# Altium PCB TMP-010.PcbDoc
Units mil, origin at the board's own origin, x right, y up, seen from the top; angles counter-clockwise.
Board outline 1750 x 1750 mil, 2 copper layers (Top Layer, Bottom Layer), stack 62.8 mil thick; 29 components, 53 nets, 365 pads, 141 vias.
Unrouted connection lines stored in the file: 1.
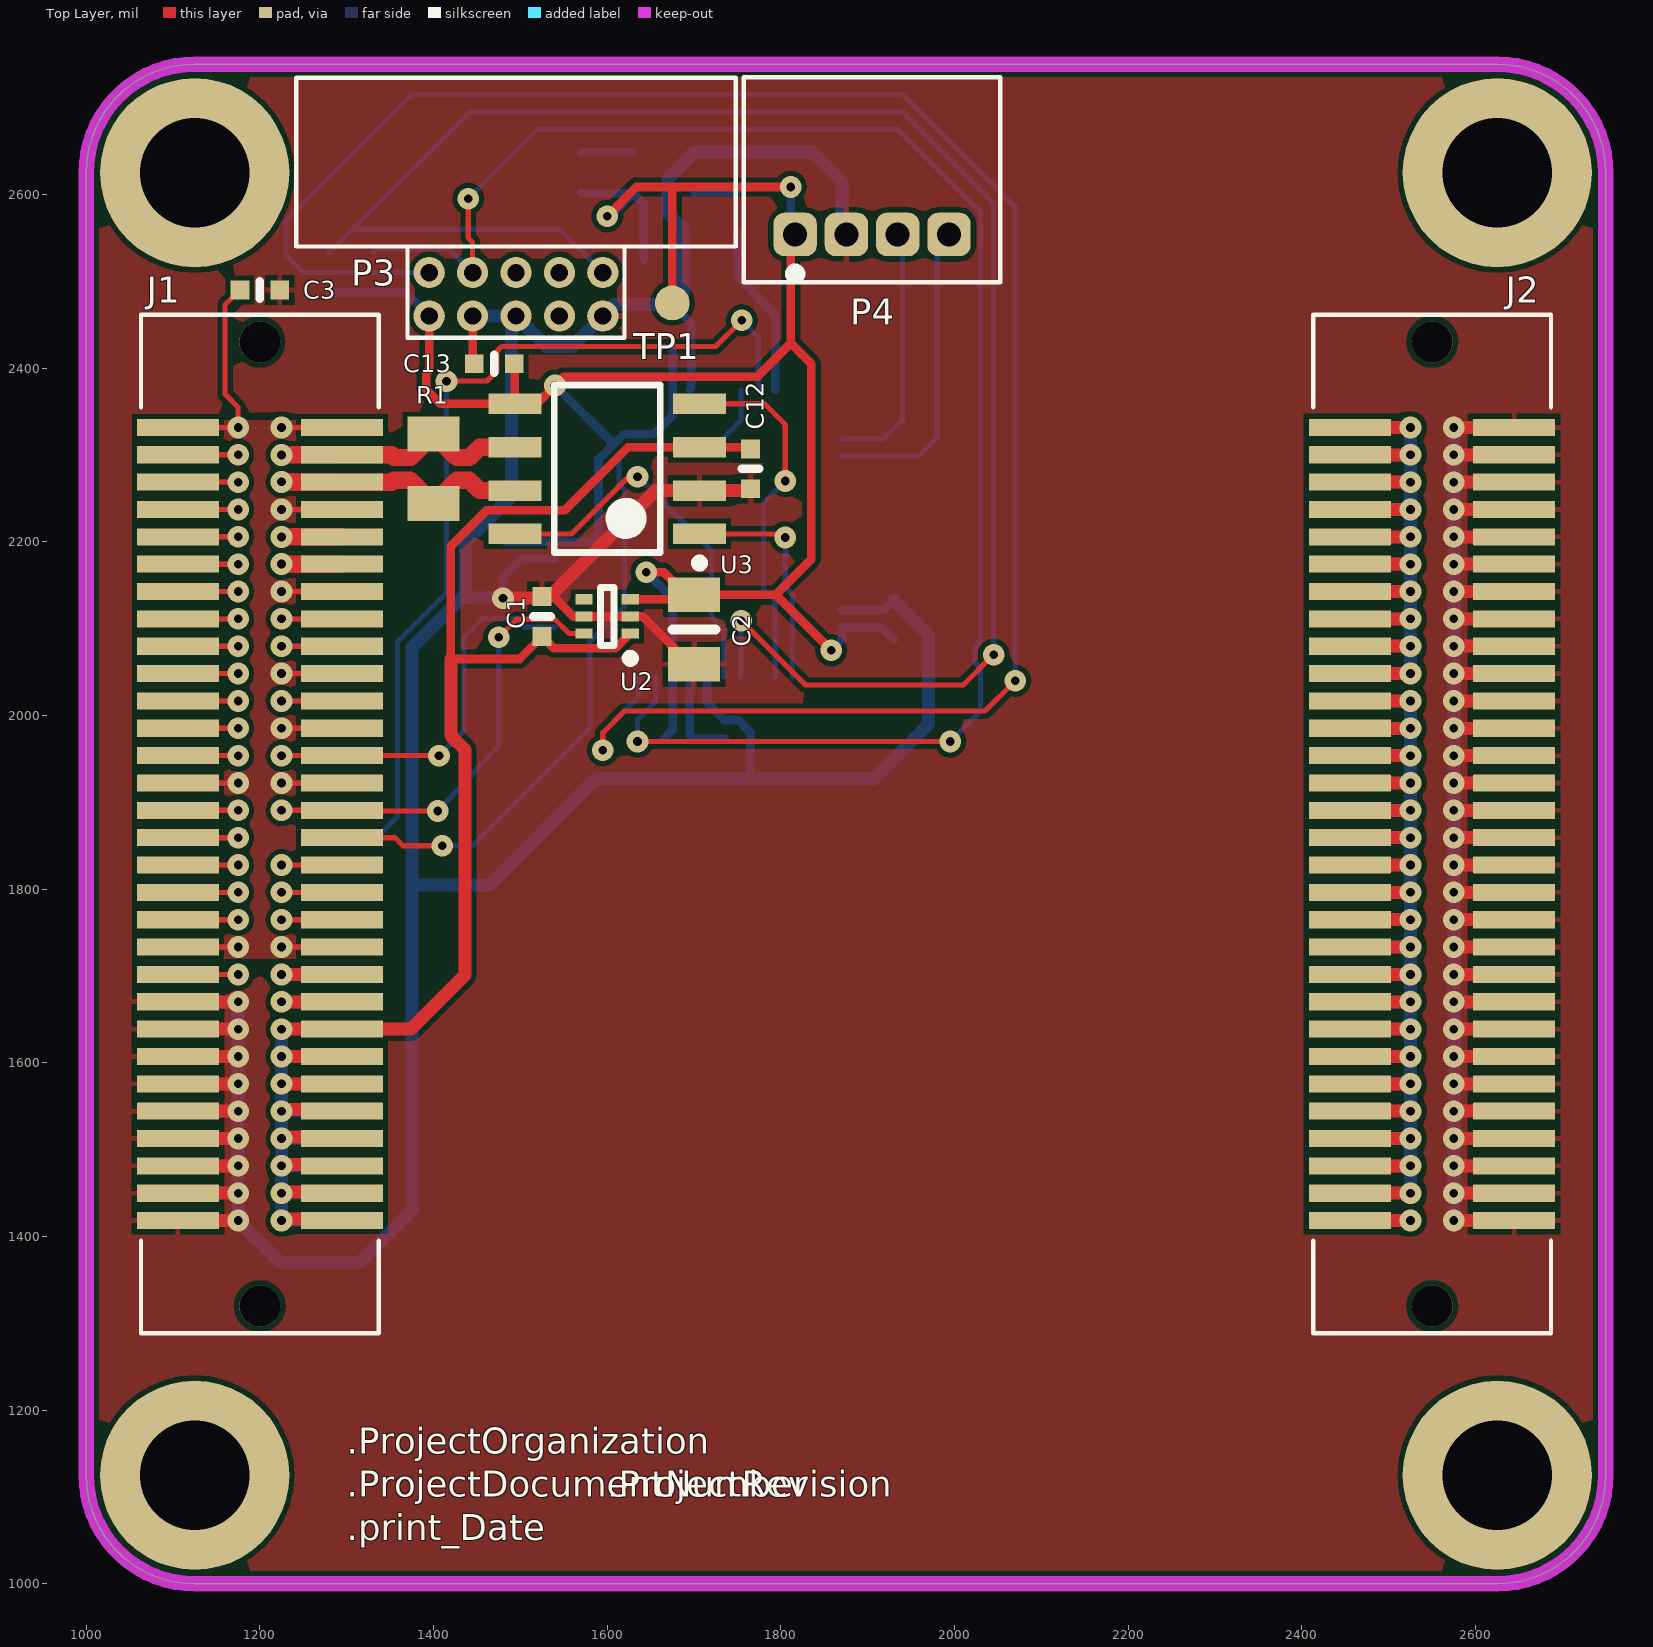
[diagram p0: Top Layer view]
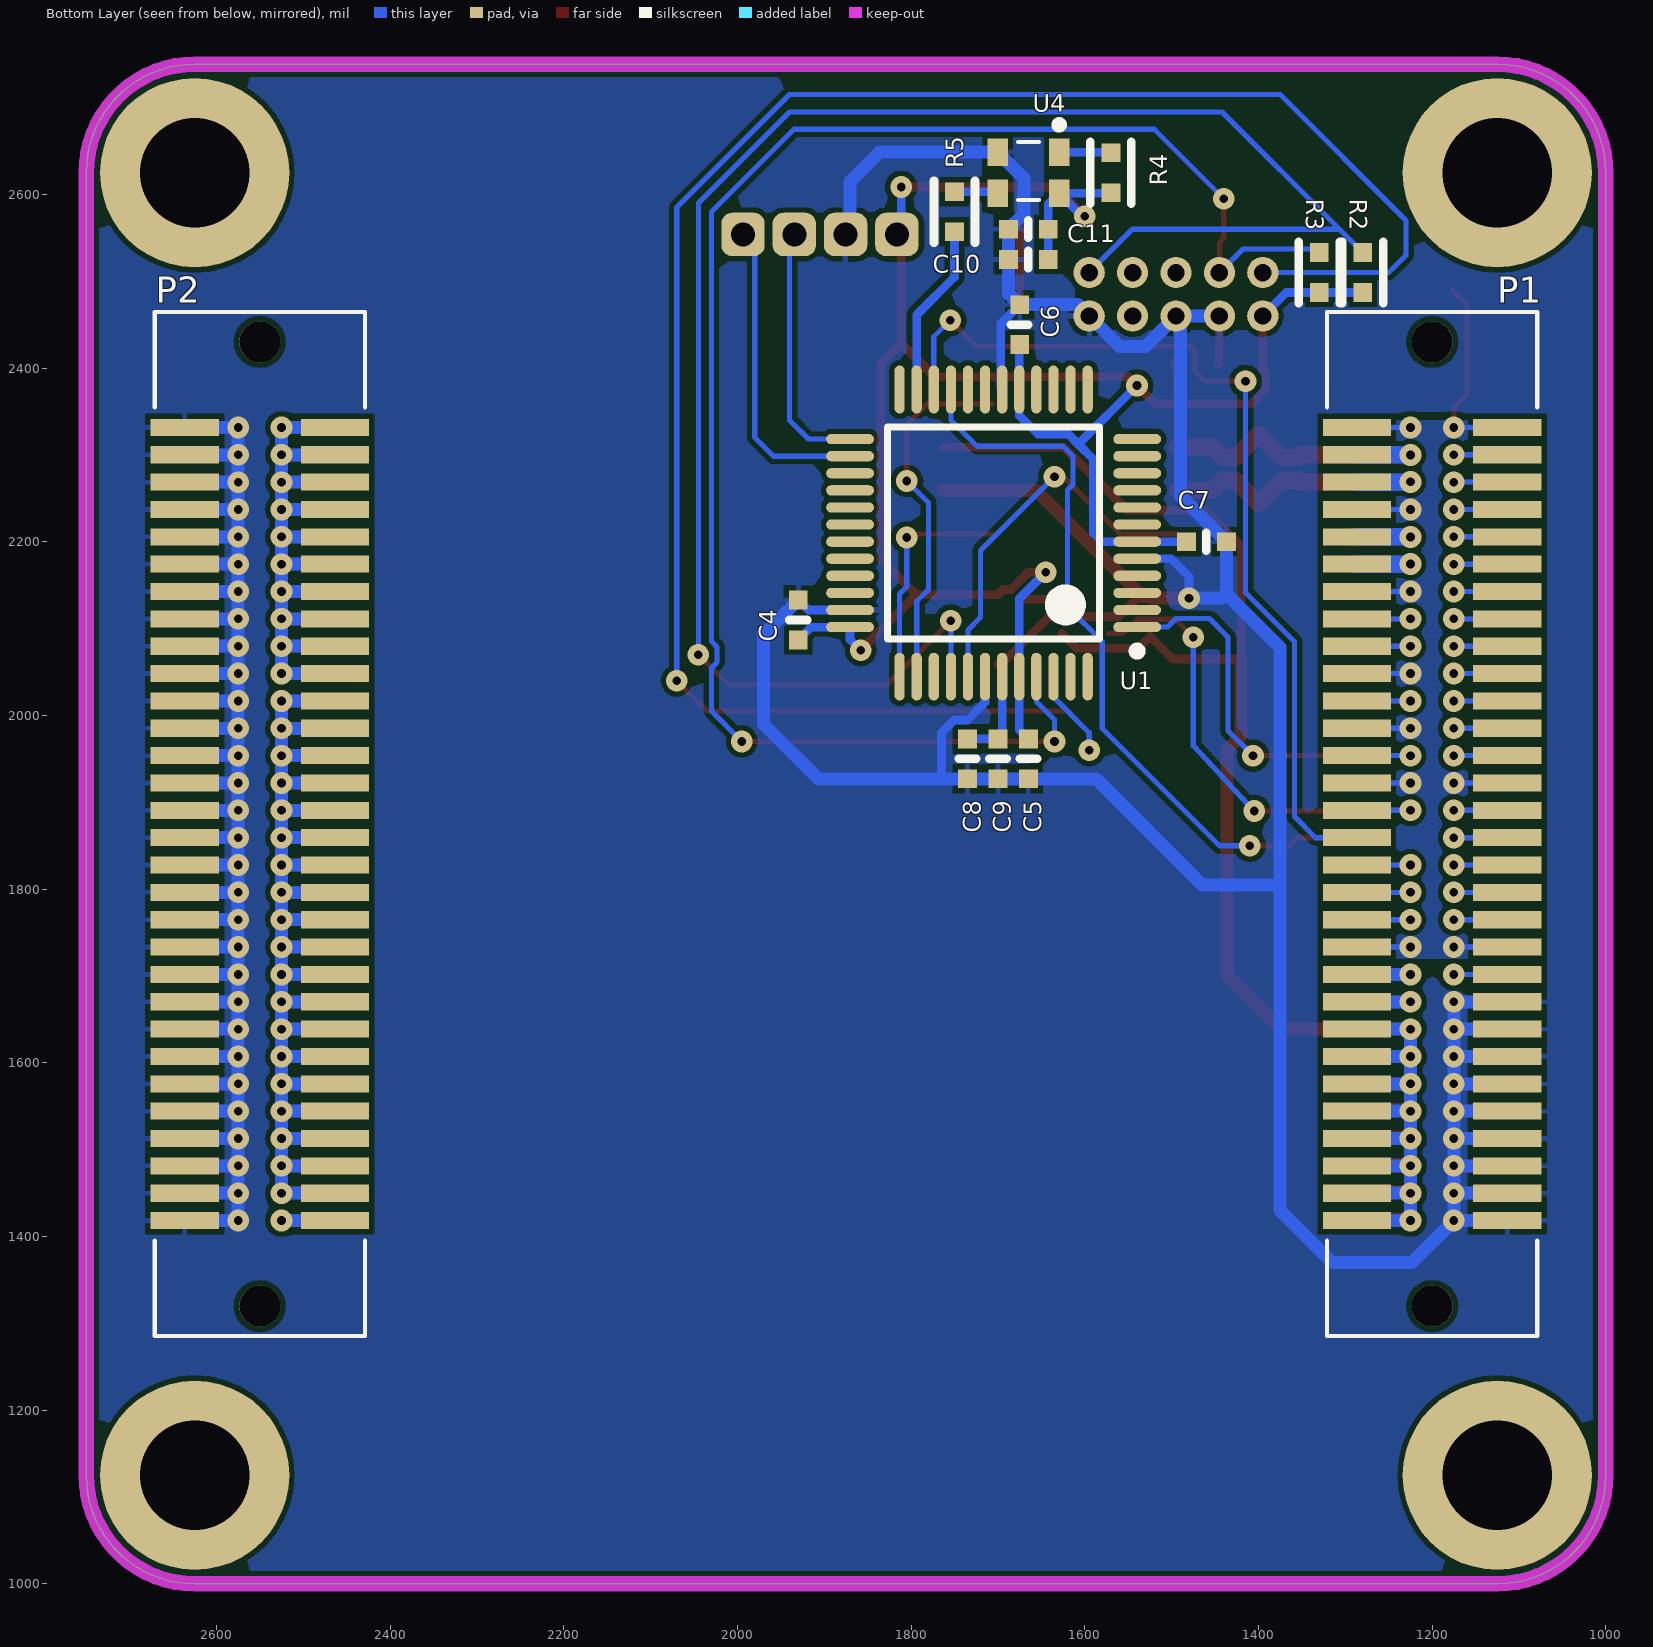
[diagram p1: Bottom Layer view, seen from below]
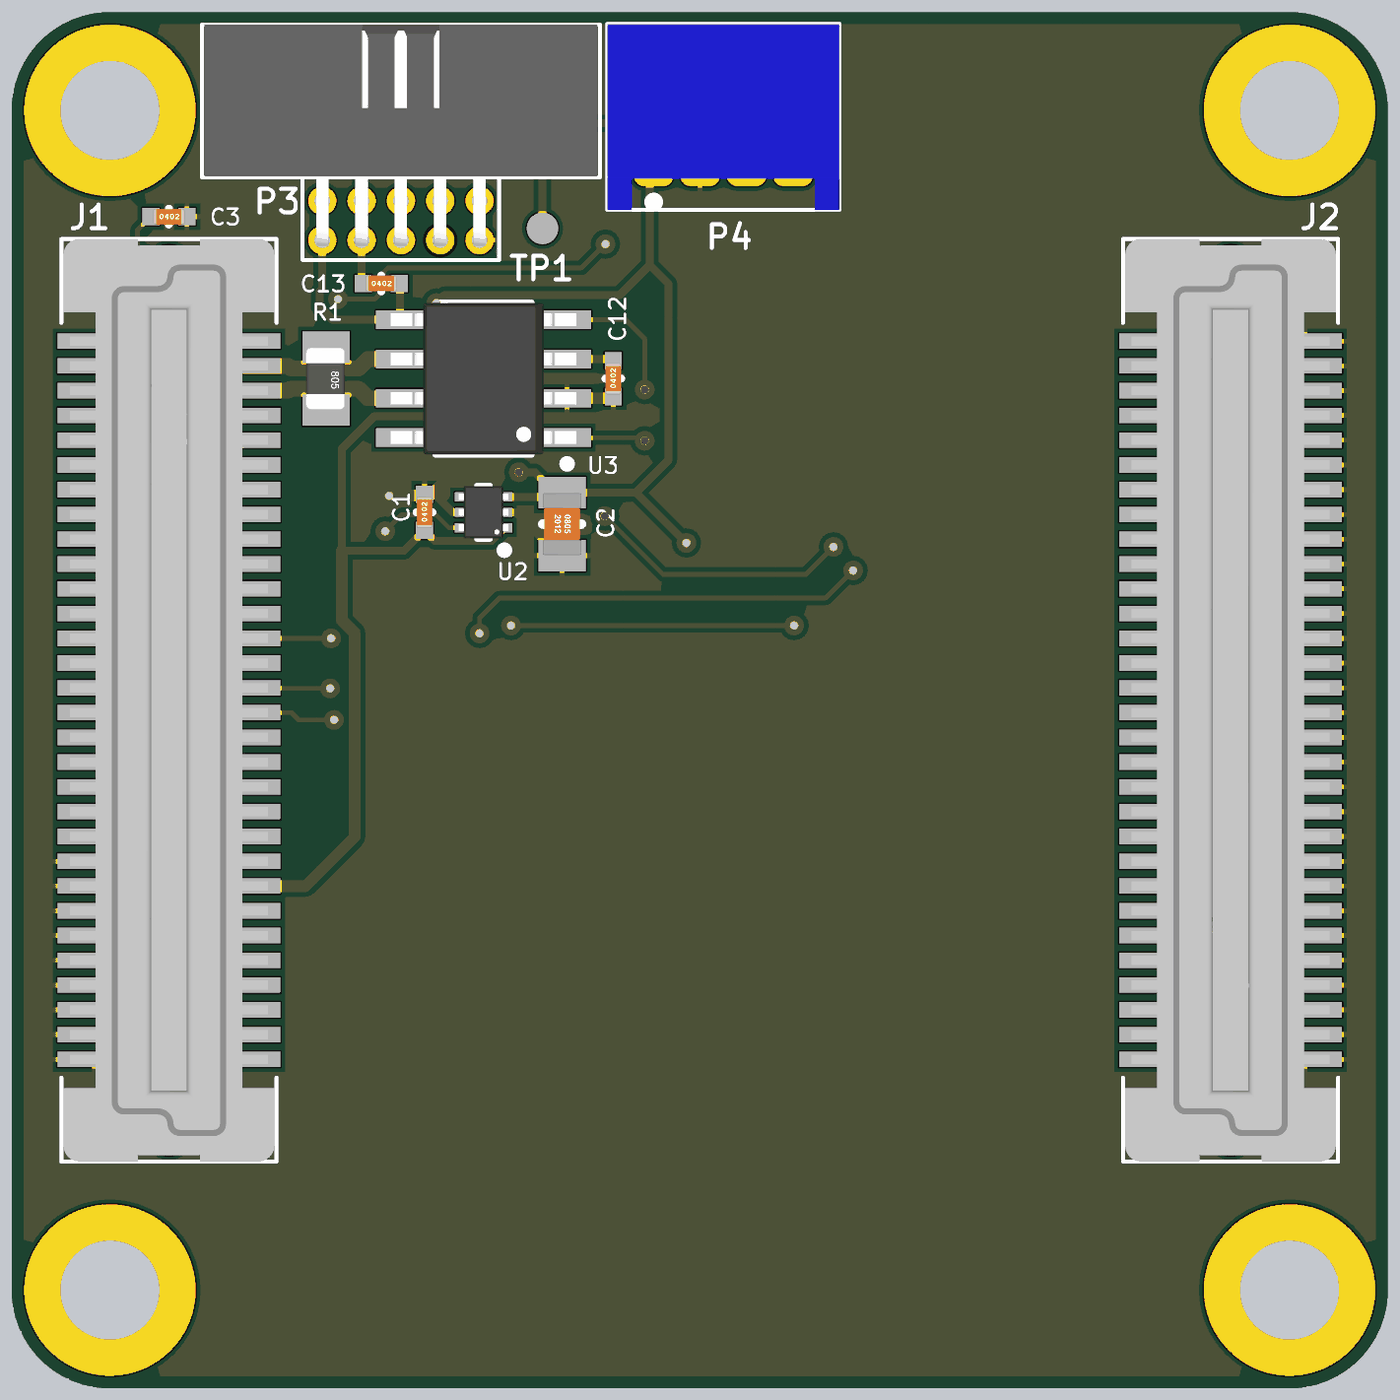
[diagram p2: 3D render of the assembled board from above, using the file's embedded part models]
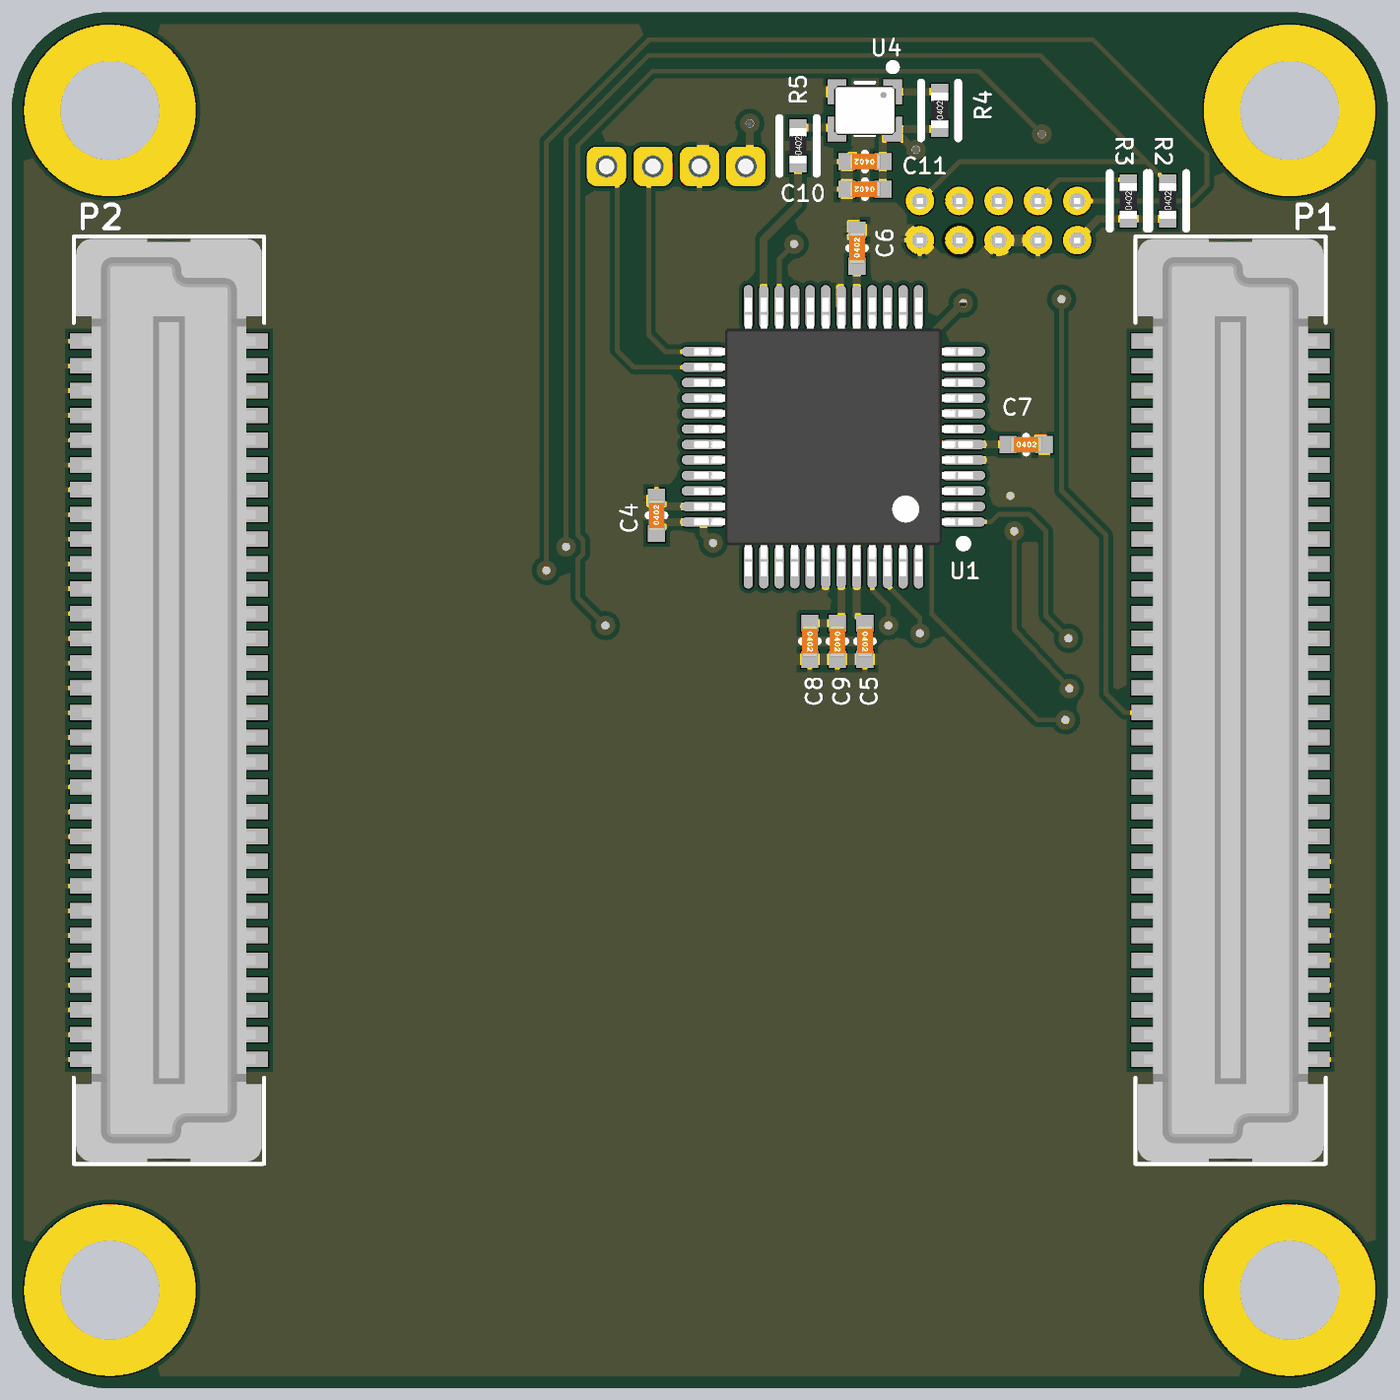
[diagram p3: 3D render of the assembled board from below, using the file's embedded part models]

## Layer stack, top to bottom
Top Solder: solder mask 1, Solder Resist, Dk 3.5
Top Layer: signal copper 1.4
Dielectric 1: core 60, FR-4, Dk 4.6
Bottom Layer: signal copper 1.4
Bottom Solder: solder mask 1, Solder Resist, Dk 3.5

## Board outline
1000,1125 1000,2625 cw(c1125,2625) 1125,2750 2625,2750 cw(c2625,2625) 2750,2625 2750,1125 cw(c2625,1125) 2625,1000 1125,1000 cw(c1125,1125)

## Design rules (kind name [scope] priority, off if disabled: settings)
AssemblyTestPointUsage AssemblyTestPointUsage_1 [All] p2:
AssemblyTestpoint AssemblyTestpoint_1 [All] p2: testpointundercomponent=TRUE minsize=40 maxsize=100 preferedsize=60 minholesize=0 maxholesize=40 preferedholesize=32 testpointgrid=1 usegrid=TRUE gridtolerance=0.01 allowsidetop=TRUE allowsidebottom=TRUE
Clearance [All] p1: gap=6 ignorepadtopadclearanceinfootprint=FALSE except(0: Arc-Hole Track-Hole SMDPad-Hole THPad-Hole Via-Hole Fill-Hole Poly-Hole Region-Hole Text-Hole)
ComponentClearance ComponentClearance_Top [OnTop vs OnTop] p1: gap=10 collisioncheckmode=3 verticalgap=100000 showdistances=FALSE
ComponentClearance ComponentClearance_Bottom [OnBottom vs OnBottom] p2: gap=10 collisioncheckmode=3 verticalgap=100000 showdistances=FALSE
DiffPairsRouting [All] p1: maxlimit=6 minlimit=6 mostfreqgap=6 toplayer_minwidth=20 toplayer_maxwidth=20 toplayer_prefwidth=20 bottomlayer_minwidth=20 bottomlayer_maxwidth=20 bottomlayer_prefwidth=20 maxuncoupledlength=500
FabricationTestPointUsage FabricationTestPointUsage_1 [All] p2: valid=0 allowmultiple=FALSE
FabricationTestpoint FabricationTestpoint_1 [All] p2: side=3 testpointundercomponent=TRUE minsize=40 maxsize=100 preferedsize=60 minholesize=0 maxholesize=40 preferedholesize=32 testpointgrid=1 allowsidetop=TRUE allowsidebottom=TRUE usegrid=TRUE gridtolerance=0.01
Height Height_Bottom [TouchesRoom('BoardHeight_Bottom') and OnBottom and not ((Name='J1') or (Name='J2') or (Name='P1') or (Name='P2') )] p1: minheight=0 maxheight=152 prefheight=0
Height Height_Top [TouchesRoom('BoardHeight_Top') and OnTop and not ((Name='J1') or (Name='J2') or (Name='P1') or (Name='P2') )] p2: minheight=0 maxheight=310 prefheight=0
HoleSize [All] p1: absolutevalues=TRUE maxlimit=130 minlimit=10 maxpercent=80.000 minpercent=20.000
MinimumSolderMaskSliver [All] p1: minsoldermaskwidth=3
PolygonConnect [All] p1: thpad.connectstyle=Relief thpad.reliefconductorwidth=6 thpad.reliefentries=4 thpad.polygonreliefangle="90 Angle" thpad.airgapwidth=6 smdpad.connectstyle=Relief smdpad.reliefconductorwidth=6 smdpad.reliefentries=4 smdpad.polygonreliefangle="90 Angle" smdpad.airgapwidth=6 via.connectstyle=Direct via.reliefconductorwidth=10 via.reliefentries=4 via.polygonreliefangle="90 Angle" via.airgapwidth=10
RoomDefinition BoardHeight_Bottom [False] p1: confinementstyle=ConfineIn formatcopy=TRUE lockcomponents=FALSE outline 1000,2750 2750,2750 2750,1000 1000,1000
RoomDefinition BoardHeight_Top [False] p2: confinementstyle=ConfineIn formatcopy=TRUE lockcomponents=FALSE outline 2750,2750 1000,2750 1000,1000 2750,1000
RoutingVias [All] p1: holewidth=10 width=25 viastyle="Through Hole" minholewidth=10 minwidth=25 maxholewidth=28 maxwidth=50
SilkToBoardRegionClearance SilkToBoardRegionClearance_1 [All] p2:
SilkToSilkClearance [All] p1: silktosilkclearance=2
SilkToSolderMaskClearance [IsPad] p1: minsilkscreentomaskgap=4 clearancetoexposedcopper=TRUE
SolderMaskExpansion [All] p1: expansion=2 istentingtop=FALSE
UnRoutedNet [All] p1: checkbadconnections=TRUE
Width "Schematic Width Constraint_1" [InNet('XTAL')] p1: maxlimit=10 minlimit=10 preferedwidth=10
Width "Schematic Width Constraint" [InNet('NetR5_1')] p2: maxlimit=10 minlimit=10 preferedwidth=10
Width Width_1 [All] p3: maxlimit=100 minlimit=6 preferedwidth=10
22 further rules are at their usual default settings.

## Classes and differential pairs
component class Sheet1: C1 C2 C3 C12 C13 J1 J2 P1 P2 P4 R1 U2 U3
component class Sheet2: C4 C5 C6 C7 C8 C9 C10 C11 R2 R3 U4
differential pair CAN1: +CAN1_P -CAN1_N
differential pair CAN0: +CAN0_P -CAN0_N

## Components (designator, comment, footprint, x,y, rotation, side; value= is the part's Value field where it differs from the comment)
C1 "1µF" SMD-0402C 1525,2114 r0 top
C2 "4.7µF" SMD-0805C 1700,2099 r180 top
C3 "0.10µF" SMD-0402C 1200,2490 r270 top
C4 "0.10µF" SMD-0402C 1930,2110 r180 bottom
C5 "0.10µF" SMD-0402C 1665,1950 r0 bottom
C6 "0.10µF" SMD-0402C 1675,2450 r180 bottom
C7 "0.10µF" SMD-0402C 1460,2200 r270 bottom
C8 "1µF" SMD-0402C 1735,1950 r0 bottom
C9 "0.10µF" SMD-0402C 1700,1950 r0 bottom
C10 "0.10µF" SMD-0402C 1665,2525 r90 bottom
C11 "10000pF" SMD-0402C 1665,2560 r90 bottom
C12 "0.10µF" SMD-0402C 1765,2284 r0 top
C13 "0.10µF" SMD-0402C 1470,2405 r270 top
J1 "10144517-062802LF" 10144517-062802LF 1200,1875 r90 top locked
J2 "10144517-062802LF" 10144517-062802LF 2550,1875 r90 top locked
P1 "10144518-064802LF" 10144518-064802LF 1200,1875 r270 bottom locked
P2 "10144518-064802LF" 10144518-064802LF 2550,1875 r270 bottom locked
P3 "2x5_0.05_SWD" 2X5_0.05_R 1495,2460 r180 top
P4 "S4B-ZR(LF)(SN)" S4B-ZR(LF)(SN) 1905,2735 r180 top
R1 "120" SMD-0805-RES 1400,2284 r180 top
R2 "10k" SMD-0402-RES 1280,2510 r180 bottom
R3 "1k" SMD-0402-RES 1330,2510 r180 bottom
R4 "1k" SMD-0402-RES 1570,2625 r180 bottom
R5 "22" SMD-0402-RES 1750,2580 r180 bottom
TP1 "TP" TP_SMD_40 1675,2475 r90 top
U1 "ATSAMC21G17A-AUT" TSQFP50P900X900X120-48N 1705,2210 r0 bottom
U2 "NCV8170AXV330T2G" SOTFL50P160X60-6N 1600,2114 r180 top
U3 "ATA6561-GAQW" SOIC127P600X175-8N 1600,2284 r180 top
U4 "MC2016K30.0000C16ESH" MC2016 1665,2625 r0 bottom

## Footprints (in the part's own frame and the unit in brackets; to place one, negate y for a bottom-side part, rotate by r counter-clockwise, add the part's x,y. Pads: shape width x height; smd on the part's side, far side on the other; paste and mask are expansions set on the pad)
2X5_0.05_R [mil]
  round 36 hole 20: 1(100,0) 2(100,-50) 3(50,0) 4(50,-50) 5(0,0) 6(0,-50) 8(-50,-50) 9(-100,0) 10(-100,-50)
  round 36 hole 20 mask+4: 7(-50,0)
  silkscreen extent -253,-274 253,25, body extent -250,-274 250,8, height 198
10144517-062802LF [mm]
  rect 0.5x2.4 smd: 1(11.6,2.4) 2(11.6,-2.4) 3(10.8,2.4) 4(10.8,-2.4) 5(10,2.4) 6(10,-2.4) 7(9.2,2.4) 8(9.2,-2.4) 9(8.4,2.4) 10(8.4,-2.4) 11(7.6,2.4) 12(7.6,-2.4) 13(6.8,2.4) 14(6.8,-2.4) 15(6,2.4) 16(6,-2.4) 17(5.2,2.4) 18(5.2,-2.4) 19(4.4,2.4) 20(4.4,-2.4) 21(3.6,2.4) 22(3.6,-2.4) 23(2.8,2.4) 24(2.8,-2.4) 25(2,2.4) 26(2,-2.4) 27(1.2,2.4) 28(1.2,-2.4) 29(0.4,2.4) 30(0.4,-2.4) 31(-0.4,2.4) 32(-0.4,-2.4) 33(-1.2,2.4) 34(-1.2,-2.4) 35(-2,2.4) 36(-2,-2.4) 37(-2.8,2.4) 38(-2.8,-2.4) 39(-3.6,2.4) 40(-3.6,-2.4) 41(-4.4,2.4) 42(-4.4,-2.4) 43(-5.2,2.4) 44(-5.2,-2.4) 45(-6,2.4) 46(-6,-2.4) 47(-6.8,2.4) 48(-6.8,-2.4) 49(-7.6,2.4) 50(-7.6,-2.4) 51(-8.4,2.4) 52(-8.4,-2.4) 53(-9.2,2.4) 54(-9.2,-2.4) 55(-10,2.4) 56(-10,-2.4) 57(-10.8,2.4) 58(-10.8,-2.4) 59(-11.6,2.4) 60(-11.6,-2.4)
  round 1.2 hole 1.2 unplated: M1(14.1,0)
  silkscreen extent -14.9,-3.47 14.9,3.47, body extent -14.9,-3.4 14.9,3.4, height 7.65
10144518-064802LF [mm]
  rect 0.5x2 smd: 1(-11.6,2.2) 2(-11.6,-2.2) 3(-10.8,2.2) 4(-10.8,-2.2) 5(-10,2.2) 6(-10,-2.2) 7(-9.2,2.2) 8(-9.2,-2.2) 9(-8.4,2.2) 10(-8.4,-2.2) 11(-7.6,2.2) 12(-7.6,-2.2) 13(-6.8,2.2) 14(-6.8,-2.2) 15(-6,2.2) 16(-6,-2.2) 17(-5.2,2.2) 18(-5.2,-2.2) 19(-4.4,2.2) 20(-4.4,-2.2) 21(-3.6,2.2) 22(-3.6,-2.2) 23(-2.8,2.2) 24(-2.8,-2.2) 25(-2,2.2) 26(-2,-2.2) 27(-1.2,2.2) 28(-1.2,-2.2) 29(-0.4,2.2) 30(-0.4,-2.2) 31(0.4,2.2) 32(0.4,-2.2) 33(1.2,2.2) 34(1.2,-2.2) 35(2,2.2) 36(2,-2.2) 37(2.8,2.2) 38(2.8,-2.2) 39(3.6,2.2) 40(3.6,-2.2) 41(4.4,2.2) 42(4.4,-2.2) 43(5.2,2.2) 44(5.2,-2.2) 45(6,2.2) 46(6,-2.2) 47(6.8,2.2) 48(6.8,-2.2) 49(7.6,2.2) 50(7.6,-2.2) 51(8.4,2.2) 52(8.4,-2.2) 53(9.2,2.2) 54(9.2,-2.2) 55(10,2.2) 56(10,-2.2) 57(10.8,2.2) 58(10.8,-2.2) 59(11.6,2.2) 60(11.6,-2.2)
  round 1.2 hole 1.2 unplated: M2(14.1,0)
  silkscreen extent -14.97,-3.08 14.97,3.08, body extent -14.9,-3 14.9,3, height 7.65
MC2016 [mm]
  rect 0.6x0.8 smd: 1(-0.9,-0.6) 2(0.9,-0.6) 3(0.9,0.6) 4(-0.9,0.6)
  silkscreen extent -1,-1.5 0.3,0.8, body extent -1,-0.8 1,0.8, height 0.4
S4B-ZR(LF)(SN) [mm]
  rrect50% 1.27x1.27 hole 0.7: 1(2.25,4.6) 2(0.75,4.6) 3(-0.75,4.6) 4(-2.25,4.6)
  silkscreen extent -3.75,0 3.75,6, body extent -3.75,0 3.75,6, height 3.7
SMD-0402-RES [mm]
  rect 0.55x0.55 smd: 1(0,0.584) 2(0,-0.584)
  silkscreen extent -0.6,-0.9 0.6,0.9, body extent -0.27,-0.57 0.28,0.58, height 0.41
SMD-0402C [mm]
  rect 0.55x0.55 smd: 1(0,0.584) 2(0,-0.584)
  silkscreen extent -0.25,0 0.25,0, body extent -0.25,-0.51 0.25,0.51, height 0.51
SMD-0805-RES [mil]
  rect 60x40 smd: 1(0,40) 2(0,-40)
  body extent -24,-39 26,39, height 31
SMD-0805C [mil]
  rect 60x40 smd: 1(0,40) 2(0,-40)
  silkscreen extent -25,0 25,0, body extent -25,-39 25,39, height 35
SOIC127P600X175-8N [mm] "SOIC, 8-Leads, Body 4.90x3.90mm, Pitch 1.27mm, IPC Medium Density"
  rect 1.55x0.6 smd: 1(-2.7,1.905) 2(-2.7,0.635) 3(-2.7,-0.635) 4(-2.7,-1.905) 5(2.7,-1.905) 6(2.7,-0.635) 7(2.7,0.635) 8(2.7,1.905)
  silkscreen extent -2.83,-2.45 1.55,2.88, body extent -3,-2.45 3,2.45, height 1.75
SOTFL50P160X60-6N [mm] "SOTFL, 6-Leads, Body 1.60x1.60mm, Pitch 0.50mm, IPC Medium Density"
  rect 0.5x0.3 smd mask+0.051: 1(-0.675,0.5) 2(-0.675,0) 3(-0.675,-0.5) 4(0.675,-0.5) 5(0.675,0) 6(0.675,0.5)
  silkscreen extent -0.8,-0.85 0.2,1.35, body extent -0.8,-0.85 0.8,0.85, height 0.6
TP_SMD_40 [mil]
  round 40 smd: 1(0,0)
TSQFP50P900X900X120-48N [mm] "TSQFP, 48-Leads, Body 7.00x7.00mm, Pitch 0.50mm, IPC Medium Density"
  oval 1.4x0.3 smd: 1(-4.2,2.75) 2(-4.2,2.25) 3(-4.2,1.75) 4(-4.2,1.25) 5(-4.2,0.75) 6(-4.2,0.25) 7(-4.2,-0.25) 8(-4.2,-0.75) 9(-4.2,-1.25) 10(-4.2,-1.75) 11(-4.2,-2.25) 12(-4.2,-2.75) 25(4.2,-2.75) 26(4.2,-2.25) 27(4.2,-1.75) 28(4.2,-1.25) 29(4.2,-0.75) 30(4.2,-0.25) 31(4.2,0.25) 32(4.2,0.75) 33(4.2,1.25) 34(4.2,1.75) 35(4.2,2.25) 36(4.2,2.75)
  oval 0.3x1.4 smd: 13(-2.75,-4.2) 14(-2.25,-4.2) 15(-1.75,-4.2) 16(-1.25,-4.2) 17(-0.75,-4.2) 18(-0.25,-4.2) 19(0.25,-4.2) 20(0.75,-4.2) 21(1.25,-4.2) 22(1.75,-4.2) 23(2.25,-4.2) 24(2.75,-4.2) 37(2.75,4.2) 38(2.25,4.2) 39(1.75,4.2) 40(1.25,4.2) 41(0.75,4.2) 42(0.25,4.2) 43(-0.25,4.2) 44(-0.75,4.2) 45(-1.25,4.2) 46(-1.75,4.2) 47(-2.25,4.2) 48(-2.75,4.2)
  silkscreen extent -4.32,-3.1 3.1,3.57, body extent -4.5,-4.5 4.5,4.5, height 1.2

## Part data
C1 C8: library part GCM155C71A105KE38D, "CAP CER 1UF 10V X7S 0402", Digi-Key Part Number=490-13409-1-ND, Manufacturer="Murata Electronics North America", Operating Temperature="-55°C ~ 125°C", Package / Case="0402 (1005 Metric)", Ratings=AEC-Q200, Temperature Coefficient=X7S, Tolerance=±10%, Voltage=10V, @ qty=0, Applications=Automotive, Datasheets=http://www.murata.com/~/media/webrenewal/support/library/catalog/products/capacitor/mlcc/c03e.ashx, Factory Stock=0, Features=-, Height - Seated (Max)=-, Image=//media.digikey.com/Renders/Murata%20Renders/ZRB-SERIES-0402.jpg, Lead Spacing=-, Lead Style=-, Minimum Quantity=1, Mounting Type="Surface Mount, MLCC", Packaging="Cut Tape (CT)", Part Number=GCM155C71A105KE38D, Part Status=Active, Quantity Available=7240, Series=GCM, Size / Dimension="0.039\" L x 0.020\" W (1.00mm x 0.50mm)", Thickness (Max)="0.022\" (0.55mm)", Unit Price (USD)=0.12
C2: library part GCJ21BR71C475KA01L, "CAP CER 4.7UF 16V X7R 0805", Digi-Key Part Number=490-10557-1-ND, Manufacturer="Murata Electronics North America", Operating Temperature="-55°C ~ 125°C", Package / Case="0805 (2012 Metric)", Ratings=AEC-Q200, Temperature Coefficient=X7R, Tolerance=±10%, Voltage=16V, @ qty=0, Applications="Automotive, Boardflex Sensitive", Datasheets=http://www.murata.com/~/media/webrenewal/support/library/catalog/products/capacitor/mlcc/c03e.ashx, Factory Stock=0, Features="Soft Termination", Height - Seated (Max)=-, Image=//media.digikey.com/Renders/Murata%20Renders/0805%20(2012%20Metric)%20.85mm.jpg, Lead Spacing=-, Lead Style=-, Minimum Quantity=1, Mounting Type="Surface Mount, MLCC", Packaging="Cut Tape (CT)", Part Number=GCJ21BR71C475KA01L, Part Status=Active, Quantity Available=53217, Series=GCJ, Size / Dimension="0.079\" L x 0.049\" W (2.00mm x 1.25mm)", Thickness (Max)="0.057\" (1.45mm)", Unit Price (USD)=0.44
C3 C4 C5 C6 C7 C9 C10 C12 C13: library part GCM155R71C104KA55D, "CAP CER 0.1UF 16V X7R 0402", Digi-Key Part Number=490-4759-1-ND, Manufacturer="Murata Electronics North America", Operating Temperature="-55°C ~ 125°C", Package / Case="0402 (1005 Metric)", Ratings=AEC-Q200, Temperature Coefficient=X7R, Tolerance=±10%, Voltage=16V, @ qty=0, Applications=Automotive, Datasheets=http://www.murata.com/~/media/webrenewal/support/library/catalog/products/capacitor/mlcc/c03e.ashx, Factory Stock=0, Features=-, Height - Seated (Max)=-, Image=//media.digikey.com/Renders/Murata%20Renders/ZRB-SERIES-0402.jpg, Lead Spacing=-, Lead Style=-, Minimum Quantity=1, Mounting Type="Surface Mount, MLCC", Packaging="Cut Tape (CT)", Part Number=GCM155R71C104KA55D, Part Status=Active, Quantity Available=734194, Series=GCM, Size / Dimension="0.039\" L x 0.020\" W (1.00mm x 0.50mm)", Thickness (Max)="0.022\" (0.55mm)", Unit Price (USD)=0.1
C11: library part GCM155R71E103KA37D, "CAP CER 10000PF 25V X7R 0402", Digi-Key Part Number=490-6043-1-ND, Manufacturer="Murata Electronics North America", Operating Temperature="-55°C ~ 125°C", Package / Case="0402 (1005 Metric)", Ratings=AEC-Q200, Temperature Coefficient=X7R, Tolerance=±10%, Voltage=25V, @ qty=0, Applications=Automotive, Datasheets=http://www.murata.com/~/media/webrenewal/support/library/catalog/products/capacitor/mlcc/c03e.ashx, Factory Stock=0, Features=-, Height - Seated (Max)=-, Image=//media.digikey.com/Renders/Murata%20Renders/ZRB-SERIES-0402.jpg, Lead Spacing=-, Lead Style=-, Minimum Quantity=1, Mounting Type="Surface Mount, MLCC", Packaging="Cut Tape (CT)", Part Number=GCM155R71E103KA37D, Part Status=Active, Quantity Available=128782, Series=GCM, Size / Dimension="0.039\" L x 0.020\" W (1.00mm x 0.50mm)", Thickness (Max)="0.022\" (0.55mm)", Unit Price (USD)=0.1
R1: library part ERJ-P6WJ121V, "RES SMD 120 OHM 5% 1/2W 0805", Digi-Key Part Number=P16943CT-ND, Manufacturer="Panasonic Electronic Components", Operating Temperature="-55°C ~ 155°C", Package / Case="0805 (2012 Metric)", Power (Watts)="0.5W, 1/2W", Supplier Device Package=0805, Temperature Coefficient=±200ppm/°C, Tolerance=±5%, @ qty=1500, Composition="Thick Film", Datasheets=https://industrial.panasonic.com/cdbs/www-data/pdf/RDA0000/AOA0000C243.pdf, Factory Stock=0, Failure Rate=-, Features="Automotive AEC-Q200, Pulse Withstanding", Height - Seated (Max)="0.030\" (0.75mm)", Image=//media.digikey.com/Renders/Panasonic%20Renders/ERJ-0805%20Pkg.jpg, Minimum Quantity=1, Number of Terminations=2, Packaging="Cut Tape (CT)", Part Number=ERJ-P6WJ121V, Part Status=Active, Quantity Available=4133, Series=ERJ, Size / Dimension="0.079\" L x 0.049\" W (2.00mm x 1.25mm)", Unit Price (USD)=0.08237
R2: library part ERJ-2GEJ103X, "RES SMD 10K OHM 5% 1/10W 0402", Digi-Key Part Number=P10KJCT-ND, Manufacturer="Panasonic Electronic Components", Operating Temperature="-55°C ~ 155°C", Package / Case="0402 (1005 Metric)", Power (Watts)="0.1W, 1/10W", Supplier Device Package=0402, Temperature Coefficient=±200ppm/°C, Tolerance=±5%, @ qty=1500, Composition="Thick Film", Datasheets=http://industrial.panasonic.com/www-cgi/jvcr13pz.cgi?E+PZ+3+AOA0001+ERJ2GEJ103X+7+WW, Factory Stock=0, Failure Rate=-, Features="Automotive AEC-Q200", Height - Seated (Max)="0.016\" (0.40mm)", Image=//media.digikey.com/Photos/Panasonic%20Photos/ERJ-PA2-Series.jpg, Minimum Quantity=1, Number of Terminations=2, Packaging="Cut Tape (CT)", Part Number=ERJ-2GEJ103X, Part Status=Active, Quantity Available=2560215, Series=ERJ, Size / Dimension="0.039\" L x 0.020\" W (1.00mm x 0.50mm)", Unit Price (USD)=0.00350
R3 R4: library part ERJ-2GEJ102X, "RES SMD 1K OHM 5% 1/10W 0402", Digi-Key Part Number=P1.0KJCT-ND, Manufacturer="Panasonic Electronic Components", Operating Temperature="-55°C ~ 155°C", Package / Case="0402 (1005 Metric)", Power (Watts)="0.1W, 1/10W", Supplier Device Package=0402, Temperature Coefficient=±200ppm/°C, Tolerance=±5%, @ qty=1500, Composition="Thick Film", Datasheets=http://industrial.panasonic.com/www-cgi/jvcr13pz.cgi?E+PZ+3+AOA0001+ERJ2GEJ102X+7+WW, Factory Stock=0, Failure Rate=-, Features="Automotive AEC-Q200", Height - Seated (Max)="0.016\" (0.40mm)", Image=//media.digikey.com/Photos/Panasonic%20Photos/ERJ-PA2-Series.jpg, Minimum Quantity=1, Number of Terminations=2, Packaging="Cut Tape (CT)", Part Number=ERJ-2GEJ102X, Part Status=Active, Quantity Available=1939857, Series=ERJ, Size / Dimension="0.039\" L x 0.020\" W (1.00mm x 0.50mm)", Unit Price (USD)=0.00350
R5: library part ERJ-2RKF22R0X, "RES SMD 22 OHM 1% 1/10W 0402", Digi-Key Part Number=P22.0LCT-ND, Manufacturer="Panasonic Electronic Components", Operating Temperature="-55°C ~ 155°C", Package / Case="0402 (1005 Metric)", Power (Watts)="0.1W, 1/10W", Supplier Device Package=0402, Temperature Coefficient=±100ppm/°C, Tolerance=±1%, @ qty=1500, Composition="Thick Film", Datasheets=http://industrial.panasonic.com/www-cgi/jvcr13pz.cgi?E+PZ+3+AOA0002+ERJ2RKF22R0X+7+WW, Factory Stock=0, Failure Rate=-, Features="Automotive AEC-Q200", Height - Seated (Max)="0.016\" (0.40mm)", Image=//media.digikey.com/Photos/Panasonic%20Photos/ERJ-PA2-Series.jpg, Minimum Quantity=1, Number of Terminations=2, Packaging="Cut Tape (CT)", Part Number=ERJ-2RKF22R0X, Part Status=Active, Quantity Available=620432, Series=ERJ, Size / Dimension="0.039\" L x 0.020\" W (1.00mm x 0.50mm)", Unit Price (USD)=0.00496
J1 J2: Unit Price (USD)=1.28
P1 P2: Unit Price (USD)=1.52
P3: Unit Price (USD)=0.75
P4: Unit Price (USD)=0.24
U1: Unit Price (USD)=2.35
U2: Unit Price (USD)=0.44
U3: Unit Price (USD)=0.53
U4: Unit Price (USD)=2.37

## Free pads (board coordinates)
  round 218 hole 125.98: 0(1125,1125) 0(1125,2625) 0(2625,1125) 0(2625,2625)

## Via types
v1: diameter 25, hole 10, Top Layer to Bottom Layer, tented both sides, 141 vias

## Nets (pads, with @x,y where several pads share a name; then routed paths per layer and width w, separated by ;. In a path a pad name is that pad's centre, name@x,y a point inside that pad or via, vN(x,y) a via of type N, cw(c..) or ccw(c..) an arc to the next point about the centre after c; other vN are vias at no path point)
+0.9V_REF: J1.42 P1.42 | length 131.1
  Top Layer w15: v1(1225,1701.77) J1.42
  Bottom Layer w15: v1(1225,1701.77) P1.42
+3.3V: C2.2 C4.2 C5.2 C6.2 C7.2 C10.2 C11.2 C13.1 P3.1 P4.1 R2.2 R3.2 R4.2 TP1.1 U1.6 U1.17 U1.36 U1.44 U2.3 U3.5 U4.4 | length 2837
  Top Layer w10: P3.1 1395,2398.23 1391.5,2394.73 1391.5,2375.27 1407.77,2359 U3.5 ; C13.1@1493.7,2404.3 U3.5 ; v1(1600,2575) 1633.58,2608.58 1675,2608.58 ; U2.3 C2.2@1676,2133.69 ; v1(1645,2165) 1665,2165 1685,2145 1694,2145 C2.2 1794,2139 ; TP1.1 1675,2608.58 ; P4.1@1811.42,2553.9 1811.42,2428.58 ; v1(1811.42,2608.58) 1675,2608.58 ; v1(1858,2075) 1794,2139 ; U3.5 1519,2359 v1(1540,2380) 1550,2390 1772.83,2390 1811.42,2428.58 ; 1794,2139 1835,2180 1835,2405 1811.42,2428.58
  Top Layer w15: C13.1 C13.1@1493.7,2404.3
  Bottom Layer w10: R2.2 R3.2 1368,2487 P3.1 ; C7.2@1483.16,2200.16 U1.6 1580.16,2200.16 1590,2210 1590,2294.8 1607.6,2312.4 ; v1(1540,2380) 1607.6,2312.4 ; R4.2 1570.62,2601.38 U4.4 ; v1(1600,2575) 1603.19,2575 U4.4 ; C10.2 C11.2 1642,2588.94 U4.4 ; v1(1645,2165) 1675.47,2134.53 U1.44 1675.47,1983.47 C5.2 ; C6.2 1675.47,2426.53 U1.17 1675.47,2345.47 1654,2324 1619.2,2324 1607.6,2312.4 ; P4.1@1811.42,2553.9 v1(1811.42,2608.58) ; v1(1858,2075) 1870.35,2087.35 U1.36 1915.27,2101.73 C4.2
+5V: C1.2 C12.1 J1.46 J1.48 J1.50 J1.52 J1.54 J1.56 J1.58 J1.60 P1.46 P1.48 P1.50 P1.52 P1.54 P1.56 P1.58 P1.60 U2.1 U3.3 | length 2557.4
  Top Layer w10: U2.1 1609.67,2077.41 1538.59,2077.41 C1.2 1499,2065 1420,2065 1420,2195 1461.19,2236.19 1551.19,2236.19 1624,2309 U3.3 C12.1@1763,2309
  Top Layer w15: v1(1225,1575.79) J1.50 ; v1(1225,1607.28) J1.48 ; v1(1225,1638.78) J1.46 1373.78,1638.78 1436,1701 1436,1960.77 1420,1976.77 1420,2065 ; v1@1235.51,1420 J1.60@1305,1420 ; v1@1235.51,1451.5 J1.58@1305,1451.5 ; v1@1235.51,1482.99 J1.56@1305,1482.99 ; v1@1235.51,1514.49 J1.54@1305,1514.49 ; v1@1235.51,1545.98 J1.52@1305,1545.98
  Bottom Layer w15: P1.60 v1(1225,1418.31) v1(1225,1449.8) ; P1.58 v1(1225,1449.8) ; P1.56 v1(1225,1481.3) ; P1.54 v1(1225,1512.8) ; P1.52 v1(1225,1544.29) ; P1.50 v1(1225,1575.79) ; P1.48 v1(1225,1607.28) ; P1.46 v1(1225,1638.78) v1(1225,1607.28) ; v1(1225,1449.8) v1(1225,1481.3) ; v1(1225,1481.3) v1(1225,1512.8) ; v1(1225,1512.8) v1(1225,1544.29) ; v1(1225,1544.29) v1(1225,1575.79) ; v1(1225,1575.79) v1(1225,1607.28)
+5V_BOOTSTRAP: J1.44 P1.44 | length 131.1
  Top Layer w15: v1(1225,1670.28) J1.44
  Bottom Layer w15: v1(1225,1670.28) P1.44
+5V_Preboot: J1.25 P1.25 | length 131.1
  Top Layer w6: J1.25 v1(1175,1953.74)
  Bottom Layer w6: P1.25 v1(1175,1953.74)
+12V: J2.1 J2.3 J2.5 J2.7 J2.9 J2.11 J2.13 J2.15 J2.17 J2.19 P2.1 P2.3 P2.5 P2.7 P2.9 P2.11 P2.13 P2.15 P2.17 P2.19 | length 1594.5
  Top Layer w15: J2.19 v1(2525,2048.23) ; J2.17 v1(2525,2079.72) ; J2.15 v1(2525,2111.22) ; J2.13 v1(2525,2142.72) ; J2.11 v1(2525,2174.21) ; J2.9 v1(2525,2205.71) ; J2.7 v1(2525,2237.2) ; J2.5 v1(2525,2268.7) ; J2.3 v1(2525,2300.2) ; J2.1 v1(2525,2331.69)
  Bottom Layer w15: P2.19 v1(2525,2048.23) v1(2525,2079.72) ; P2.17 v1(2525,2079.72) ; P2.15 v1(2525,2111.22) ; P2.13 v1(2525,2142.72) ; P2.11 v1(2525,2174.21) ; P2.9 v1(2525,2205.71) ; P2.7 v1(2525,2237.2) ; P2.5 v1(2525,2268.7) ; P2.3 v1(2525,2300.2) ; P2.1 v1(2525,2331.69) v1(2525,2300.2) ; v1(2525,2079.72) v1(2525,2111.22) ; v1(2525,2111.22) v1(2525,2142.72) ; v1(2525,2142.72) v1(2525,2174.21) ; v1(2525,2174.21) v1(2525,2205.71) ; v1(2525,2205.71) v1(2525,2237.2) ; v1(2525,2237.2) v1(2525,2268.7) ; v1(2525,2268.7) v1(2525,2300.2)
+VBAT: J2.21 J2.23 J2.25 J2.27 J2.29 J2.31 J2.33 J2.35 J2.37 J2.39 J2.41 J2.43 J2.45 J2.47 J2.49 J2.51 J2.53 J2.55 J2.57 P2.21 P2.23 P2.25 P2.27 P2.29 P2.31 P2.33 P2.35 P2.37 P2.39 P2.41 P2.43 P2.45 P2.47 P2.49 P2.51 P2.53 P2.55 P2.57 | length 3057.9
  Top Layer w15: J2.57 v1(2525,1449.8) ; J2.55 v1(2525,1481.3) ; J2.53 v1(2525,1512.8) ; J2.51 v1(2525,1544.29) ; J2.49 v1(2525,1575.79) ; J2.47 v1(2525,1607.28) ; J2.45 v1(2525,1638.78) ; J2.43 v1(2525,1670.28) ; J2.41 v1(2525,1701.77) ; J2.39 v1(2525,1733.27) ; J2.37 v1(2525,1764.76) ; J2.35 v1(2525,1796.26) ; J2.33 v1(2525,1827.76) ; J2.31 v1(2525,1859.25) ; J2.29 v1(2525,1890.75) ; J2.27 v1(2525,1922.24) ; J2.25 v1(2525,1953.74) ; J2.23 v1(2525,1985.24) ; J2.21 v1(2525,2016.73)
  Bottom Layer w15: P2.57 v1(2525,1449.8) v1(2525,1481.3) ; P2.55 v1(2525,1481.3) ; P2.53 v1(2525,1512.8) ; P2.51 v1(2525,1544.29) ; P2.49 v1(2525,1575.79) ; P2.47 v1(2525,1607.28) ; P2.45 v1(2525,1638.78) ; P2.43 v1(2525,1670.28) ; P2.41 v1(2525,1701.77) ; P2.39 v1(2525,1733.27) ; P2.37 v1(2525,1764.76) ; P2.35 v1(2525,1796.26) ; P2.33 v1(2525,1827.76) ; P2.31 v1(2525,1859.25) ; P2.29 v1(2525,1890.75) ; P2.27 v1(2525,1922.24) ; P2.25 v1(2525,1953.74) ; P2.23 v1(2525,1985.24) ; P2.21 v1(2525,2016.73) v1(2525,1985.24) ; v1(2525,1481.3) v1(2525,1512.8) ; v1(2525,1512.8) v1(2525,1544.29) ; v1(2525,1544.29) v1(2525,1575.79) ; v1(2525,1575.79) v1(2525,1607.28) ; v1(2525,1607.28) v1(2525,1638.78) ; v1(2525,1638.78) v1(2525,1670.28) ; v1(2525,1670.28) v1(2525,1701.77) ; v1(2525,1701.77) v1(2525,1733.27) ; v1(2525,1733.27) v1(2525,1764.76) ; v1(2525,1764.76) v1(2525,1796.26) ; v1(2525,1796.26) v1(2525,1827.76) ; v1(2525,1827.76) v1(2525,1859.25) ; v1(2525,1859.25) v1(2525,1890.75) ; v1(2525,1890.75) v1(2525,1922.24) ; v1(2525,1922.24) v1(2525,1953.74) ; v1(2525,1953.74) v1(2525,1985.24)
+VBAT_Preboot: J2.59 P2.59 | length 131.1
  Top Layer w15: J2.59 v1(2525,1418.31)
  Bottom Layer w15: P2.59 v1(2525,1418.31)
CAN0_N: J1.4 P1.4 R1.2 U3.6 | length 354.2
  Top Layer w20: v1@1230,2299.95 1237,2299.95 1237.24,2300.2 J1.4 1351.73,2300.2 1354.93,2297 1373,2297 R1.2 1427,2297 1441.19,2297 1453.19,2309 U3.6
  Bottom Layer w20: v1(1225,2299.95) 1232,2299.95 1232.24,2300.2 P1.4
CAN0_P: J1.6 P1.6 R1.1 U3.7 | length 353.8
  Top Layer w20: v1@1230,2268.95 1237,2268.95 1237.24,2268.7 J1.6 1351.73,2268.7 1354.03,2271 1373,2271 R1.1 1427,2271 1441.19,2271 1453.19,2259 U3.7
  Bottom Layer w20: v1(1225,2268.95) 1232,2268.95 1232.24,2268.7 P1.6
CAN0_RX: U1.38 U3.4 | length 475.3
  Top Layer w6: U3.4 1781,2359 1805,2335 v1(1805,2270)
  Bottom Layer w6: 1793.58,2105 U1.38 1793.58,2131.42 1780,2145 1780,2245 v1(1805,2270)
CAN0_STBY: U1.41 U3.8 | length 440.2
  Top Layer w6: U3.8 1559,2209 1625,2275 v1(1635,2275)
  Bottom Layer w6: v1(1635,2275) 1720,2190 1720,2113.02 1734.53,2098.49 U1.41
CAN0_TX: U1.37 U3.1 | length 264.1
  Top Layer w6: U3.1 1801,2209 v1(1805,2205)
  Bottom Layer w6: v1(1805,2205) 1805,2148.27 1813.27,2140 U1.37
CAN1_N: J1.10 P1.10 | length 126.3
  Top Layer w20: v1@1230,2205.46 1237,2205.46 1237.24,2205.71 J1.10
  Bottom Layer w20: v1(1225,2205.46) 1232,2205.46 1232.24,2205.71 P1.10
CAN1_P: J1.12 P1.12 | length 126.3
  Top Layer w20: v1@1230,2174.46 1237,2174.46 1237.24,2174.21 J1.12
  Bottom Layer w20: v1(1225,2174.46) 1232,2174.46 1232.24,2174.21 P1.12
CTRL_SYNC: J1.26 P1.26 U1.1 | length 508.6
  Top Layer w6: v1(1225,1953.74) J1.26 v1(1406.26,1953.74)
  Bottom Layer w6: v1(1225,1953.74) P1.26 ; v1(1406.26,1953.74) 1435,1982.48 1435,2090 1456.5,2111.5 1495,2111.5 1504.77,2101.73 U1.1
DEBUG_RX: P4.4 U1.26 | length 356
  Bottom Layer w6: U1.26 1958.58,2298.58 1980,2320 1980,2545.31 P4.4@1988.58,2553.9
DEBUG_TX: P4.3 U1.25 | length 296.9
  Bottom Layer w6: U1.25 1918.27,2318.27 1940,2340 1940,2543.43 P4.3@1929.53,2553.9
DETECT_A: J1.32 U1.21 | length 871.3
  Top Layer w6: J1.32 1355.75,1859.25 1365,1850 v1(1410,1850)
  Bottom Layer w6: v1(1410,1850) 1445,1850 1580,1985 1580,2085 1620,2125 1620,2259.59 1613.5,2266.09 1613.5,2298.5 1625,2310 1724.21,2310 1754.21,2340 U1.21
DETECT_B: P1.32 U1.22 | length 1076.6
  Top Layer w6: v1(1415,2385) 1415.17,2385.17 1461.55,2385.17 1473.17,2396.79 1473.17,2419.55 1478.45,2424.83 1724.83,2424.83 v1(1755,2455)
  Bottom Layer w6: P1.32 1334.25,1859.25 1358.5,1883.5 1358.5,2084.83 1415,2141.33 v1(1415,2385) ; v1(1755,2455) 1773.9,2436.1 U1.22
DRAIN: C3.2 J1.1 J1.2 J1.8 J1.14 J1.20 J1.24 J1.27 J1.28 J1.39 J1.40 P1.1 P1.2 P1.8 P1.14 P1.20 P1.24 P1.27 P1.28 P1.39 P1.40 | length 1552.1
  Top Layer w6: J1.39 v1(1175,1733.27) ; J1.27 v1(1175,1922.24) ; C3.2 1160,2473 1160,2370 1175,2355 v1(1175,2331.69) ; v1(1225,1733.27) J1.40 ; v1(1225,1922.24) J1.28 ; v1(1225,1985.24) J1.24 ; v1(1225,2048.23) J1.20 ; v1(1225,2142.72) J1.14 ; v1(1225,2237.2) J1.8 ; v1(1225,2331.69) J1.2 ; v1(1175,2331.69) J1.1 v1(1175,2331.69)
  Bottom Layer w6: P1.39 v1(1175,1733.27) ; P1.27 v1(1175,1922.24) ; P1.1 v1(1175,2331.69) ; v1(1225,1733.27) P1.40 ; v1(1225,1922.24) P1.28 ; v1(1225,1985.24) P1.24 ; v1(1225,2048.23) P1.20 ; v1(1225,2142.72) P1.14 ; v1(1225,2237.2) P1.8 ; v1(1225,2331.69) P1.2
EN_0: J1.34 P1.34 | length 131.1
  Top Layer w6: v1(1225,1827.76) J1.34
  Bottom Layer w6: v1(1225,1827.76) P1.34
EN_1: J1.36 P1.36 | length 131.1
  Top Layer w6: v1(1225,1796.26) J1.36
  Bottom Layer w6: v1(1225,1796.26) P1.36
EN_2: J1.38 P1.38 | length 131.1
  Top Layer w6: v1(1225,1764.76) J1.38
  Bottom Layer w6: v1(1225,1764.76) P1.38
GND: C1.1 C2.1 C3.1 C4.1 C5.1 C6.1 C7.1 C8.1 C9.1 C10.1 C11.1 C12.2 C13.2 J1.43 J1.45 J1.47 J1.49 J1.51 J1.53 J1.55 J1.57 J1.59 J2.2 J2.4 J2.6 J2.8 J2.10 J2.12 J2.14 J2.16 J2.18 J2.20 J2.22 J2.24 J2.26 J2.28 J2.30 J2.32 J2.34 J2.36 J2.38 J2.40 J2.42 J2.44 J2.46 J2.48 J2.50 J2.52 J2.54 J2.56 J2.58 J2.60 P1.43 P1.45 P1.47 P1.49 P1.51 P1.53 P1.55 P1.57 P1.59 P2.2 P2.4 P2.6 P2.8 P2.10 P2.12 P2.14 P2.16 P2.18 P2.20 P2.22 P2.24 P2.26 P2.28 P2.30 P2.32 P2.34 P2.36 P2.38 P2.40 P2.42 P2.44 P2.46 P2.48 P2.50 P2.52 P2.54 P2.56 P2.58 P2.60 P3.3 P3.5 P3.9 P4.2 U1.5 U1.18 U1.35 U1.42 U2.2 U2.5 U3.2 U4.2 | length 10202.5
  Top Layer w10: P3.3 1445,2405 C13.2 ; C1.1 1538,2137 1561,2114 U2.5 U2.2 1641,2114 1696,2059 C2.1
  Top Layer w15: J1.59 v1(1175,1418.31) ; J1.57 v1(1175,1449.8) ; J1.55 v1(1175,1481.3) ; J1.53 v1(1175,1512.8) ; J1.51 v1(1175,1544.29) ; J1.49 v1(1175,1575.79) ; J1.47 v1(1175,1607.28) ; J1.45 v1(1175,1638.78) ; J1.43 v1(1175,1670.28) ; v1(1480,2135) 1523,2135 C1.1 1533.77,2137 1655.77,2259 U3.2 C12.2@1763,2259 ; v1(2575,1418.31) J2.60 ; v1(2575,1449.8) J2.58 ; v1(2575,1481.3) J2.56 ; v1(2575,1512.8) J2.54 ; v1(2575,1544.29) J2.52 ; v1(2575,1575.79) J2.50 ; v1(2575,1607.28) J2.48 ; v1(2575,1638.78) J2.46 ; v1(2575,1670.28) J2.44 ; v1(2575,1701.77) J2.42 ; v1(2575,1733.27) J2.40 ; v1(2575,1764.76) J2.38 ; v1(2575,1796.26) J2.36 ; v1(2575,1827.76) J2.34 ; v1(2575,1859.25) J2.32 ; v1(2575,1890.75) J2.30 ; v1(2575,1922.24) J2.28 ; v1(2575,1953.74) J2.26 ; v1(2575,1985.24) J2.24 ; v1(2575,2016.73) J2.22 ; v1(2575,2048.23) J2.20 ; v1(2575,2079.72) J2.18 ; v1(2575,2111.22) J2.16 ; v1(2575,2142.72) J2.14 ; v1(2575,2174.21) J2.12 ; v1(2575,2205.71) J2.10 ; v1(2575,2237.2) J2.8 ; v1(2575,2268.7) J2.6 ; v1(2575,2300.2) J2.4 ; v1(2575,2331.69) J2.2
  Bottom Layer w10: v1(1480,2135) 1480,2159.79 1500.68,2180.47 U1.5 ; C6.1 1696.83,2451.17 1696.83,2377.02 U1.18 ; U1.42 1714.84,2015.16 1735.17,1994.83 1750.38,1994.83 1765,1980.21 1765,1927 ; U1.35 1918.42,2121.42 C4.1
  Bottom Layer w15: P1.59 v1(1175,1418.31) ; P1.57 v1(1175,1449.8) ; P1.55 v1(1175,1481.3) ; P1.53 v1(1175,1512.8) ; P1.51 v1(1175,1544.29) ; P1.49 v1(1175,1575.79) ; P1.47 v1(1175,1607.28) ; P1.45 v1(1175,1638.78) ; P1.43 v1(1175,1670.28) v1(1175,1638.78) ; P3.3@1440,2460 P3.3 1490,2460 1490,2253 C7.1 1437,2140 ; v1(1480,2135) 1442,2135 1437,2140 ; P3.5@1490,2465 1530,2425 1560,2425 1608,2473 C6.1 1688,2486 C10.1 C11.1 1670,2578 1670,2618.19 U4.2 1836.38,2648.62 1870.47,2614.53 P4.2@1870.47,2556.61 ; C4.1 1970,2093 1970,1990 1907,1927 1765,1927 C8.1 C9.1 C5.1 1587,1927 1465,1805 1375,1805 ; P2.60 v1(2575,1418.31) v1(2575,1449.8) ; P2.58 v1(2575,1449.8) ; P2.56 v1(2575,1481.3) ; P2.54 v1(2575,1512.8) ; P2.52 v1(2575,1544.29) ; P2.50 v1(2575,1575.79) ; P2.48 v1(2575,1607.28) ; P2.46 v1(2575,1638.78) ; P2.44 v1(2575,1670.28) ; P2.42 v1(2575,1701.77) ; P2.40 v1(2575,1733.27) ; P2.38 v1(2575,1764.76) ; P2.36 v1(2575,1796.26) ; P2.34 v1(2575,1827.76) ; P2.32 v1(2575,1859.25) ; P2.30 v1(2575,1890.75) ; P2.28 v1(2575,1922.24) ; P2.26 v1(2575,1953.74) ; P2.24 v1(2575,1985.24) ; P2.22 v1(2575,2016.73) ; P2.20 v1(2575,2048.23) ; P2.18 v1(2575,2079.72) ; P2.16 v1(2575,2111.22) ; P2.14 v1(2575,2142.72) ; P2.12 v1(2575,2174.21) ; P2.10 v1(2575,2205.71) ; P2.8 v1(2575,2237.2) ; P2.6 v1(2575,2268.7) ; P2.4 v1(2575,2300.2) ; P2.2 v1(2575,2331.69) v1(2575,2300.2) ; v1(1175,1418.31) 1223.31,1370 1315,1370 1375,1430 1375,1805 ; v1(1175,1418.31) v1(1175,1449.8) ; v1(1175,1449.8) v1(1175,1481.3) ; v1(1175,1481.3) v1(1175,1512.8) ; v1(1175,1512.8) v1(1175,1544.29) ; v1(1175,1544.29) v1(1175,1575.79) ; v1(1175,1575.79) v1(1175,1607.28) ; v1(1175,1607.28) v1(1175,1638.78) ; 1375,1805 1375,2078 1437,2140 ; v1(2575,1449.8) v1(2575,1481.3) ; v1(2575,1481.3) v1(2575,1512.8) ; v1(2575,1512.8) v1(2575,1544.29) ; v1(2575,1544.29) v1(2575,1575.79) ; v1(2575,1575.79) v1(2575,1607.28) ; v1(2575,1607.28) v1(2575,1638.78) ; v1(2575,1638.78) v1(2575,1670.28) ; v1(2575,1670.28) v1(2575,1701.77) ; v1(2575,1701.77) v1(2575,1733.27) ; v1(2575,1733.27) v1(2575,1764.76) ; v1(2575,1764.76) v1(2575,1796.26) ; v1(2575,1796.26) v1(2575,1827.76) ; v1(2575,1827.76) v1(2575,1859.25) ; v1(2575,1859.25) v1(2575,1890.75) ; v1(2575,1890.75) v1(2575,1922.24) ; v1(2575,1922.24) v1(2575,1953.74) ; v1(2575,1953.74) v1(2575,1985.24) ; v1(2575,1985.24) v1(2575,2016.73) ; v1(2575,2016.73) v1(2575,2048.23) ; v1(2575,2048.23) v1(2575,2079.72) ; v1(2575,2079.72) v1(2575,2111.22) ; v1(2575,2111.22) v1(2575,2142.72) ; v1(2575,2142.72) v1(2575,2174.21) ; v1(2575,2174.21) v1(2575,2205.71) ; v1(2575,2205.71) v1(2575,2237.2) ; v1(2575,2237.2) v1(2575,2268.7) ; v1(2575,2268.7) v1(2575,2300.2)
I2C_SCL: J1.18 P1.18 | length 131.1
  Top Layer w6: v1(1225,2079.72) J1.18
  Bottom Layer w6: v1(1225,2079.72) P1.18
I2C_SDA: J1.16 P1.16 | length 131.1
  Top Layer w6: v1(1225,2111.22) J1.16
  Bottom Layer w6: v1(1225,2111.22) P1.16
NetR4_1: R4.1 U4.1 | length 59.8
  Bottom Layer w10: R4.1 1570.62,2648.62 U4.1
NetR5_1: R5.1 U4.3 | length 50.2
  Bottom Layer w10: U4.3 1702.06,2603 R5.1
P_GOOD: J1.30 P1.30 U2.6 | length 578.8
  Top Layer w6: v1(1225,1890.75) J1.30 ; J1.30@1298.74,1890 v1(1405,1890) ; v1(1475,2090) 1495.83,2110.83 1539.55,2110.83 1556.07,2094.32 U2.6
  Bottom Layer w6: v1(1225,1890.75) P1.30 ; v1(1405,1890) 1475,1965 v1(1475,2090)
PPS: J1.22 P1.22 | length 131.1
  Top Layer w6: v1(1225,2016.73) J1.22
  Bottom Layer w6: v1(1225,2016.73) P1.22
QSPI_CLK: J1.29 P1.29 | length 131.1
  Top Layer w6: J1.29 v1(1175,1890.75)
  Bottom Layer w6: P1.29 v1(1175,1890.75)
QSPI_IO0: J1.31 P1.31 | length 131.1
  Top Layer w6: J1.31 v1(1175,1859.25)
  Bottom Layer w6: P1.31 v1(1175,1859.25)
QSPI_IO1: J1.33 P1.33 | length 131.1
  Top Layer w6: J1.33 v1(1175,1827.76)
  Bottom Layer w6: P1.33 v1(1175,1827.76)
QSPI_IO2: J1.35 P1.35 | length 131.1
  Top Layer w6: J1.35 v1(1175,1796.26)
  Bottom Layer w6: P1.35 v1(1175,1796.26)
QSPI_IO3: J1.37 P1.37 | length 131.1
  Top Layer w6: J1.37 v1(1175,1764.76)
  Bottom Layer w6: P1.37 v1(1175,1764.76)
RESET: P3.10 R2.1 U1.40 | length 2104.9
  Top Layer w6: v1(1754.21,2109.21) 1828.43,2035 2010,2035 v1(2045,2070)
  Bottom Layer w6: R2.1 1307,2560 ; P3.10 1545,2560 1307,2560 ; U1.40 v1(1754.21,2109.21) ; v1(2045,2070) 2045,2590 1940,2695 1442,2695 1307,2560
RFU_3: J1.3 P1.3 | length 131.1
  Top Layer w6: J1.3 v1(1175,2300.2)
  Bottom Layer w6: P1.3 v1(1175,2300.2)
RFU_5: J1.5 P1.5 | length 131.1
  Top Layer w6: J1.5 v1(1175,2268.7)
  Bottom Layer w6: P1.5 v1(1175,2268.7)
RFU_7: J1.7 P1.7 | length 131.1
  Top Layer w6: J1.7 v1(1175,2237.2)
  Bottom Layer w6: P1.7 v1(1175,2237.2)
RFU_9: J1.9 P1.9 | length 131.1
  Top Layer w6: J1.9 v1(1175,2205.71)
  Bottom Layer w6: P1.9 v1(1175,2205.71)
RFU_11: J1.11 P1.11 | length 131.1
  Top Layer w6: J1.11 v1(1175,2174.21)
  Bottom Layer w6: P1.11 v1(1175,2174.21)
RFU_13: J1.13 P1.13 | length 131.1
  Top Layer w6: J1.13 v1(1175,2142.72)
  Bottom Layer w6: P1.13 v1(1175,2142.72)
RFU_15: J1.15 P1.15 | length 131.1
  Top Layer w6: J1.15 v1(1175,2111.22)
  Bottom Layer w6: P1.15 v1(1175,2111.22)
RFU_17: J1.17 P1.17 | length 131.1
  Top Layer w6: J1.17 v1(1175,2079.72)
  Bottom Layer w6: P1.17 v1(1175,2079.72)
RFU_19: J1.19 P1.19 | length 131.1
  Top Layer w6: J1.19 v1(1175,2048.23)
  Bottom Layer w6: P1.19 v1(1175,2048.23)
RFU_21: J1.21 P1.21 | length 131.1
  Top Layer w6: J1.21 v1(1175,2016.73)
  Bottom Layer w6: P1.21 v1(1175,2016.73)
RFU_23: J1.23 P1.23 | length 131.1
  Top Layer w6: J1.23 v1(1175,1985.24)
  Bottom Layer w6: P1.23 v1(1175,1985.24)
SWCLK: P3.4 R3.1 U1.45 | length 1950.5
  Top Layer w6: v1(1440,2595) 1440,2550 1445,2545 P3.4 ; v1(1635,1970) v1(1995,1970)
  Bottom Layer w6: R3.1 1334,2537 1418,2537 P3.4 ; v1(1440,2595) 1520,2675 1935,2675 2030,2580 2030,2085.41 2023.5,2078.91 2023.5,2061.09 2030,2054.59 2030,2005 v1(1995,1970) ; v1(1635,1970) 1635,1995 1655.79,2015.79 U1.45
SWDIO: P3.2 U1.46 | length 2333.7
  Top Layer w6: v1(1595,1960) 1595,1980 1620,2005 2035,2005 v1(2070,2040)
  Bottom Layer w6: P3.2 1250,2510 1230,2530 1230,2570 1375,2715 1940,2715 2070,2585 v1(2070,2040) ; v1(1595,1960) 1595,1980 1636.1,2021.1 U1.46
SYNC_0: J1.41 P1.41 | length 131.1
  Top Layer w6: J1.41 v1(1175,1701.77)
  Bottom Layer w6: P1.41 v1(1175,1701.77)
VDDCORE: C8.2 C9.2 U1.43 | length 108.7
  Bottom Layer w10: U1.43 1695.16,1977.84 C9.2 C8.2
XTAL: R5.2 U1.23 | length 199.7
  Bottom Layer w10: R5.2 1750,2505 1793.58,2461.42 U1.23
pads on no net: J1.M1 J2.M1 P1.M2 P2.M2 P3.6 P3.7 P3.8 U1.2 U1.3 U1.4 U1.7 U1.8 U1.9 U1.10 U1.11 U1.12 U1.13 U1.14 U1.15 U1.16 U1.19 U1.20 U1.24 U1.27 U1.28 U1.29 U1.30 U1.31 U1.32 U1.33 U1.34 U1.39 U1.47 U1.48 U2.4

## Polygon pours and split planes (outlines as drawn)
GND on Top Layer "Top Layer-GND" (solid, remove dead copper, pour order 8): 1000,2750 2750,2750 2750,1000 1000,1000
DRAIN on Top Layer "Top Layer-DRAIN" (solid, remove dead copper, pour order 9): 1105.51,2340 1294.49,2340 1294.49,1720 1105.51,1720
GND on Bottom Layer "Bottom Layer-GND" (solid, remove dead copper, pour order 7): 2750,2750 1000,2750 1000,1000 2750,1000
DRAIN on Bottom Layer "Bottom Layer-DRAIN" (solid, remove dead copper, pour order 10): 1294.49,2340 1105.51,2340 1105.51,1720 1294.49,1720

## Keep-outs
Keep-Out Layer:
  the board outline again, w18

## Other copper
Top Layer:
  rectangle net DRAIN: 1105.51,2331.69 1294.49,2331.69
  pour cut-out: 1211.66,2345.03 1188.34,2345.03 1188.34,2349 1211.66,2349
  pour cut-out: 1188.34,1719.93 1211.66,1719.93 1211.66,1715.96 1188.34,1715.96
Bottom Layer:
  pour cut-out: 1211.66,1719.93 1188.34,1719.93 1188.34,1715.96 1211.66,1715.96
  pour cut-out: 1188.34,2345.03 1211.66,2345.03 1211.66,2349 1188.34,2349

## Silkscreen, mask and mechanical layers (free items; w line width, h text height)
Top Overlay:
  text ".ProjectOrganization" at 1300,1150 h30
  text ".ProjectDocumentNumber" at 1300,1100 h30
  text ".ProjectRevision" at 1600,1100 h30
  text ".print_Date" at 1300,1050 h30
Outline:
  the board outline again, w5